# EAGLE board r (EAGLE 7.1.0)
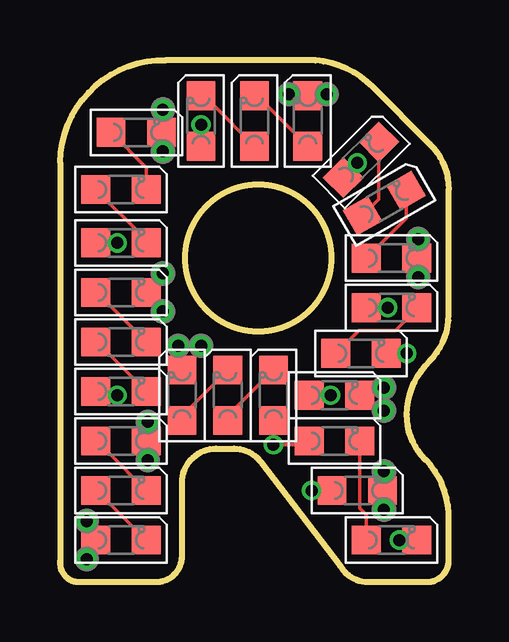
[diagram p0: board, top side]
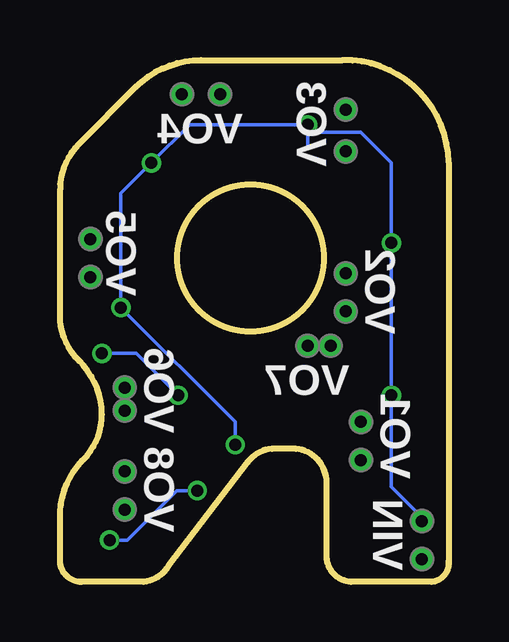
[diagram p1: board, bottom side, seen from below]

Size 16.2 x 21.75 mm. Coordinates in mm from the lower left corner, seen from the top.
Outline: 15.4,9.21 arc45 14.45,6.97 arc45 15.23,5.1 15.24,5.08 arc-45 16.2,2.61 16.2,0.9 arc-90 15.3,0 12.72,0 arc-53 11.68,0.67 8.37,5 arc53 7.24,5.56 6.5,5.56 arc90 5.08,4.14 5.08,1.16 arc-90 4.08,0 0.71,0 arc-90 0,0.87 0,17.49 arc-90 4.42,21.75 10.32,21.75 arc-45 13.03,20.62 15.41,18.25 arc-45 16.2,16.35 16.2,11.12 arc-45 15.4,9.21
Outline: 15.4,9.21 15.4,9.21 arc0 15.4,9.21
Outline: circle at 8.26,13.49 radius 3.05
Copper layers (1*16): Top 0.035mm / dielectric 1.5mm / Bottom 0.035mm
Design rules "Fusion_eagle_rule_v1.1_tms *": minimum track width 6mil, minimum drill 12mil, track to track 6mil, track to pad 6mil, pad to pad 6mil, via to via 6mil, smd to smd 0mil, copper to edge 10mil, drill to drill 10mil, minimum pad ring 10mil, minimum via ring 6mil, stop-mask expansion 2mil, vias tented up to drill 100mil, thermal gap 10mil

## Footprints (pad centres in the part's own frame; a part is rotated, then mirrored left to right if it is on the bottom)
LED_0805 = smd 1.2 x 1.2: A 0,-1.05; C 0,1.05
P1-20 = drill 0.5: TP 0,0

## Placement (x,y rotation side)
LED1  [LED_0805]  2.54,1.75 270 top
LED2  [LED_0805]  2.54,3.81 270 top
LED3  [LED_0805]  2.54,5.87 270 top
LED4  [LED_0805]  2.54,7.94 270 top
LED5  [LED_0805]  2.54,10 270 top
LED6  [LED_0805]  2.54,12.06 270 top
LED7  [LED_0805]  2.54,14.13 270 top
LED8  [LED_0805]  2.54,16.35 270 top
LED9  [LED_0805]  3.18,18.73 270 top
LED10  [LED_0805]  5.88,19.21 0 top
LED11  [LED_0805]  8.1,19.21 0 top
LED12  [LED_0805]  10.32,19.21 0 top
LED13  [LED_0805]  12.55,17.59 315 top
LED14  [LED_0805]  13.51,15.78 300 top
LED15  [LED_0805]  13.82,13.49 270 top
LED16  [LED_0805]  13.82,11.43 270 top
LED17  [LED_0805]  12.55,9.53 270 top
LED18  [LED_0805]  11.43,7.78 270 top
LED19  [LED_0805]  8.89,7.78 0 top
LED20  [LED_0805]  6.99,7.78 0 top
LED21  [LED_0805]  5.08,7.78 0 top
LED22  [LED_0805]  11.43,5.87 270 top
LED23  [LED_0805]  13.82,1.75 270 top
LED24  [LED_0805]  12.39,3.81 270 top
VIN  [P1-20]  1.12,0.95 0 top
VIN1  [P1-20]  1.12,2.54 0 top
VO1  [P1-20]  3.66,5.08 0 top
VO2  [P1-20]  4.29,12.86 0 top
VO3  [P1-20]  4.29,19.69 0 top
VO4  [P1-20]  9.53,20.32 0 top
VO5  [P1-20]  14.93,12.7 0 top
VO6  [P1-20]  13.5,8.1 0 top
VO7  [P1-20]  4.93,9.84 0 top
VO8  [P1-20]  13.5,4.6 0 top
VO9  [P1-20]  3.66,6.67 0 top
VO10  [P1-20]  4.29,11.27 0 top
VO11  [P1-20]  4.29,17.94 0 top
VO12  [P1-20]  11.12,20.32 0 top
VO13  [P1-20]  14.93,14.29 0 top
VO14  [P1-20]  13.5,7.14 0 top
VO15  [P1-20]  5.88,9.84 0 top
VO16  [P1-20]  13.5,3.02 0 top

## Library data of the parts
LED1-LED24 VIN VIN1 VO1-VO16 = CyberRailGuru

## Nets
N$1: LED23.C LED24.A
N$2: LED22.C LED23.A
N$51: LED2.C LED3.A
N$52: LED1.C LED2.A
N$53: LED5.C LED6.A
N$54: LED4.C LED5.A
N$55: LED8.C LED9.A
N$56: LED7.C LED8.A
N$57: LED11.C LED12.A
N$58: LED10.C LED11.A
N$59: LED14.C LED15.A
N$60: LED13.C LED14.A
N$61: LED17.C LED18.A
N$62: LED16.C LED17.A
N$63: LED20.C LED21.A
N$64: LED19.C LED20.A
VIN: LED1.A LED4.A LED7.A LED10.A LED13.A LED16.A LED19.A LED22.A VIN1.TP VIN.TP
VOUT1: LED3.C VO1.TP VO9.TP
VOUT2: LED6.C VO2.TP VO10.TP
VOUT3: LED9.C VO3.TP VO11.TP
VOUT4: LED12.C VO4.TP VO12.TP
VOUT5: LED15.C VO5.TP VO13.TP
VOUT6: LED18.C VO6.TP VO14.TP
VOUT7: LED21.C VO7.TP VO15.TP
VOUT8: LED24.C VO8.TP VO16.TP

## Tracks (layer width: path | path; a pad name or v marks a point on that pad's centre or on a via)
N$1  (via drill 0.5)
  Top 0.152: LED23.C v14.13,1.75 | v10.48,3.81 LED24.A
  Bottom 0.152: v14.13,1.75 13.4,1.75 LED24.A v10.48,3.81
N$2
  Top 0.152: LED23.A 12.76,2.8 12.48,3.08 LED22.C
N$51
  Top 0.152: LED3.A 2.01,5.87 2.01,5.4 LED2.C
N$52
  Top 0.152: LED2.A 1.53,3.81 LED1.C
N$53
  Top 0.152: LED6.A 1.53,12.06 LED5.C
N$54
  Top 0.152: LED5.A 1.53,10 LED4.C
N$55
  Top 0.152: LED8.C 3.59,17.27 LED9.A
N$56
  Top 0.152: LED7.C 3.59,14.25 LED8.A
N$57
  Top 0.152: LED11.C 8.22,19.94 8.54,19.94 LED12.A
N$58
  Top 0.152: LED10.C 6,19.94 6.32,19.94 LED11.A
N$59
  Top 0.152: LED14.C 14.42,15.15 LED15.A
N$60
  Top 0.152: LED13.C 13.29,15.95 LED14.A
N$61  (via drill 0.5)
  Top 0.152: v14.45,9.52 LED17.C | LED18.A v11.27,7.78
  Bottom 0.152: v14.45,9.52 13.02,9.52 v11.27,7.78
N$62
  Top 0.152: LED16.C 14.45,11.43 14.45,10.95 13.97,10.48 12.45,10.48 LED17.A
N$63
  Top 0.152: LED21.A 5.08,6.92 LED20.C
N$64
  Top 0.152: LED20.A 6.99,6.92 LED19.C
VIN  (via drill 0.5)
  Top 0.152: VIN1.TP 1.11,2.12 LED1.A 1.11,1.37 VIN.TP | 12.76,11.33 LED16.A v13.66,11.43 | LED19.A v8.89,5.71 10.22,5.71 LED22.A | 5.97,18.16 LED10.A v5.88,19.05 | LED13.A 11.8,16.88 v12.39,17.46 | v2.38,7.78 1.65,7.78 LED4.A | v2.38,14.13 LED7.A
  Bottom 0.152: LED10.A v5.88,19.05 | v5.88,19.05 5.56,18.73 3.65,18.73 2.38,17.46 v2.38,14.13 v2.38,7.78 2.38,3.97 1.11,2.7 VIN1.TP | v8.89,5.71 8.89,6.67 v13.66,11.43 13.66,16.19 v12.39,17.46 10.8,19.05 v5.88,19.05
VOUT1
  Top 0.152: VO1.TP 3.59,5.14 LED3.C 3.59,6.61 VO9.TP
VOUT2
  Top 0.152: VO10.TP 4.29,11.37 LED6.C 4.29,12.76 VO2.TP
VOUT3
  Top 0.152: LED9.C 4.29,18.79 VO3.TP VO11.TP
VOUT4
  Top 0.152: 10.26,20 LED12.C | VO4.TP 10.26,20.32 LED12.C | VO12.TP 10.38,20.32 LED12.C
VOUT5
  Top 0.152: VO13.TP 14.86,14.23 LED15.C 14.86,12.76 VO5.TP
VOUT6
  Top 0.152: LED18.C 12.8,8.1 VO6.TP VO14.TP
VOUT7
  Top 0.152: LED21.C 5.08,9.68 VO7.TP VO15.TP
VOUT8
  Top 0.152: VO8.TP 13.44,4.54 LED24.C 13.44,3.08 VO16.TP

## Text on the board
201bmp: R